# EAGLE board Q Arduino Panel (EAGLE 7.7.0), part 1 of 2
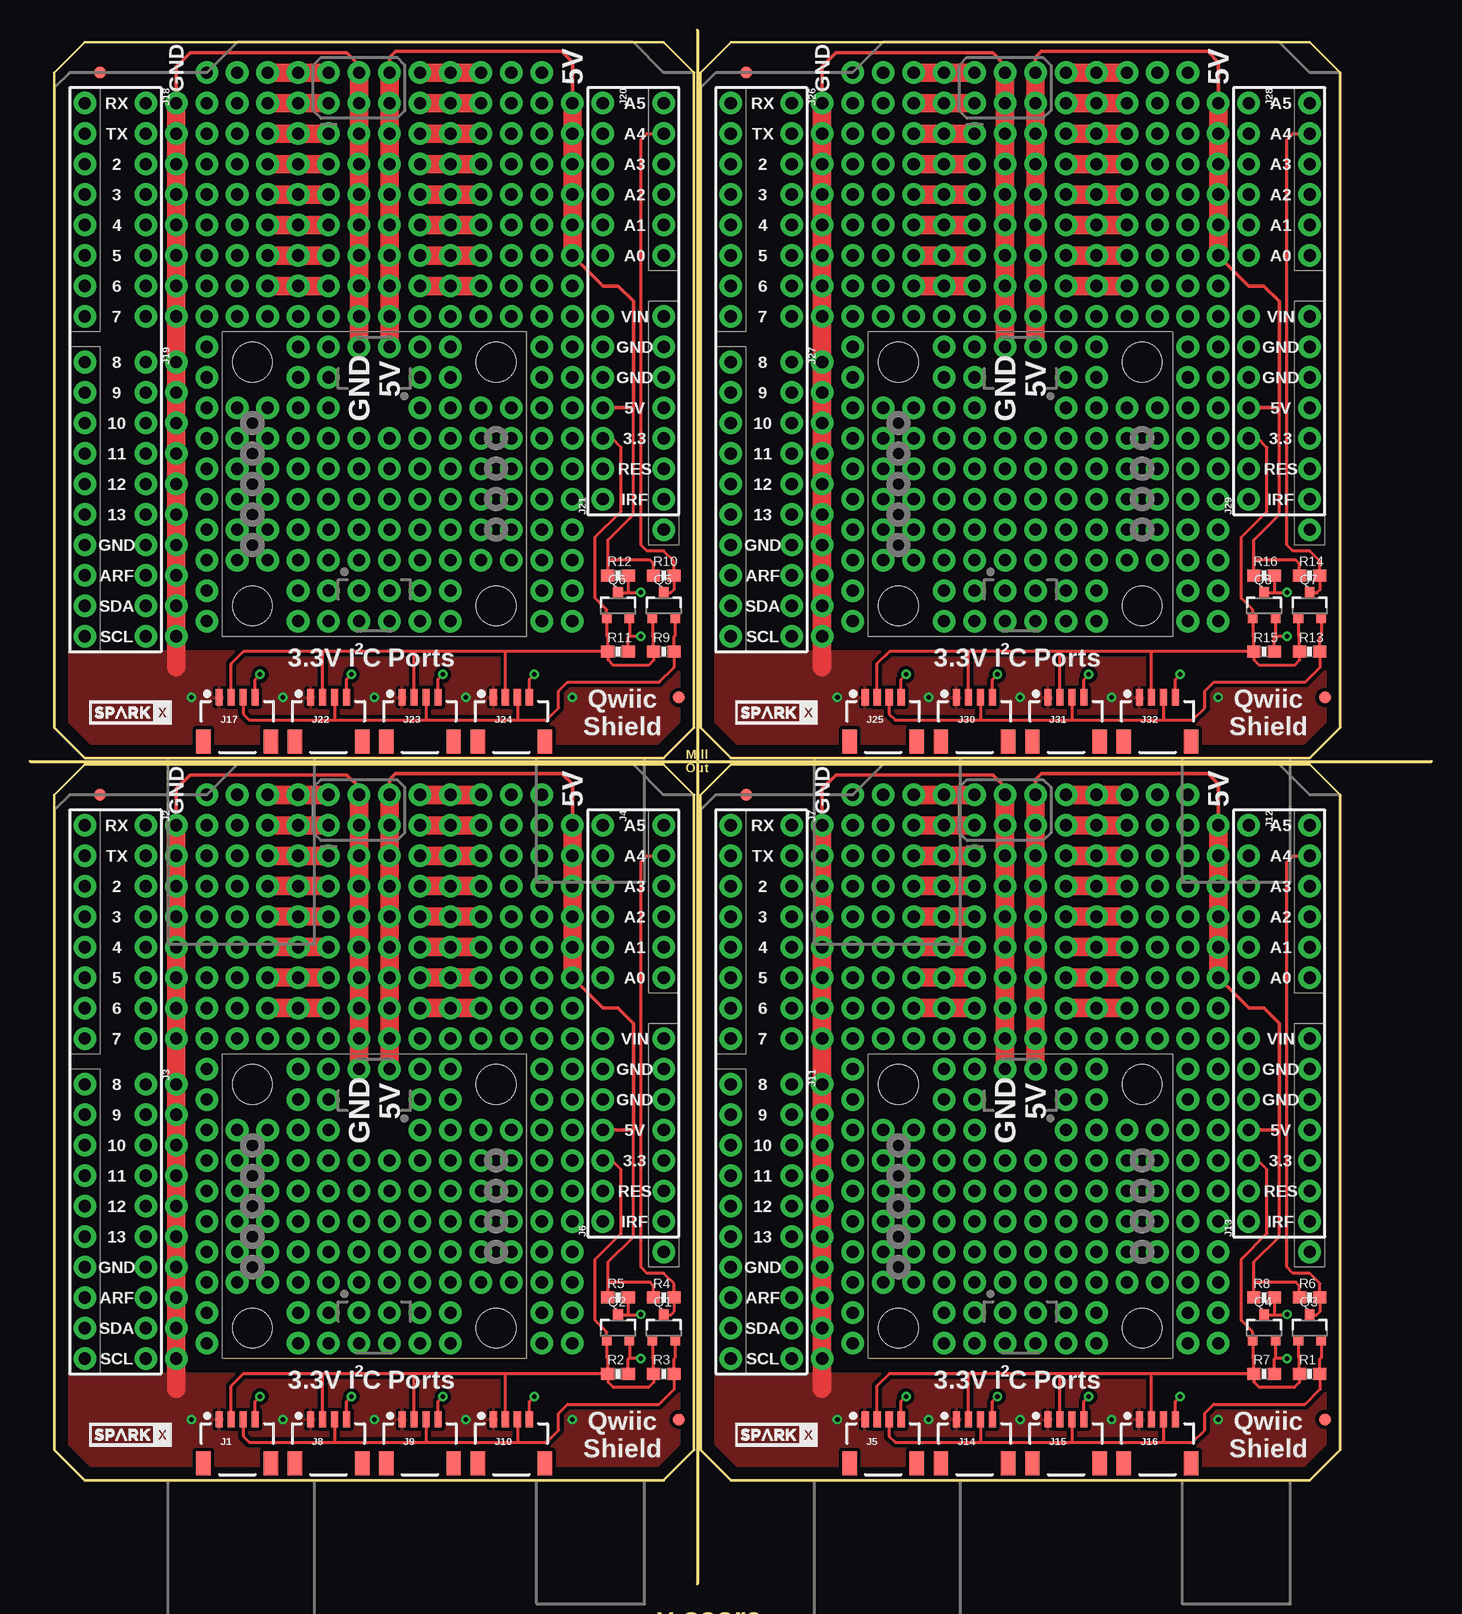
[diagram p0: board, top side]
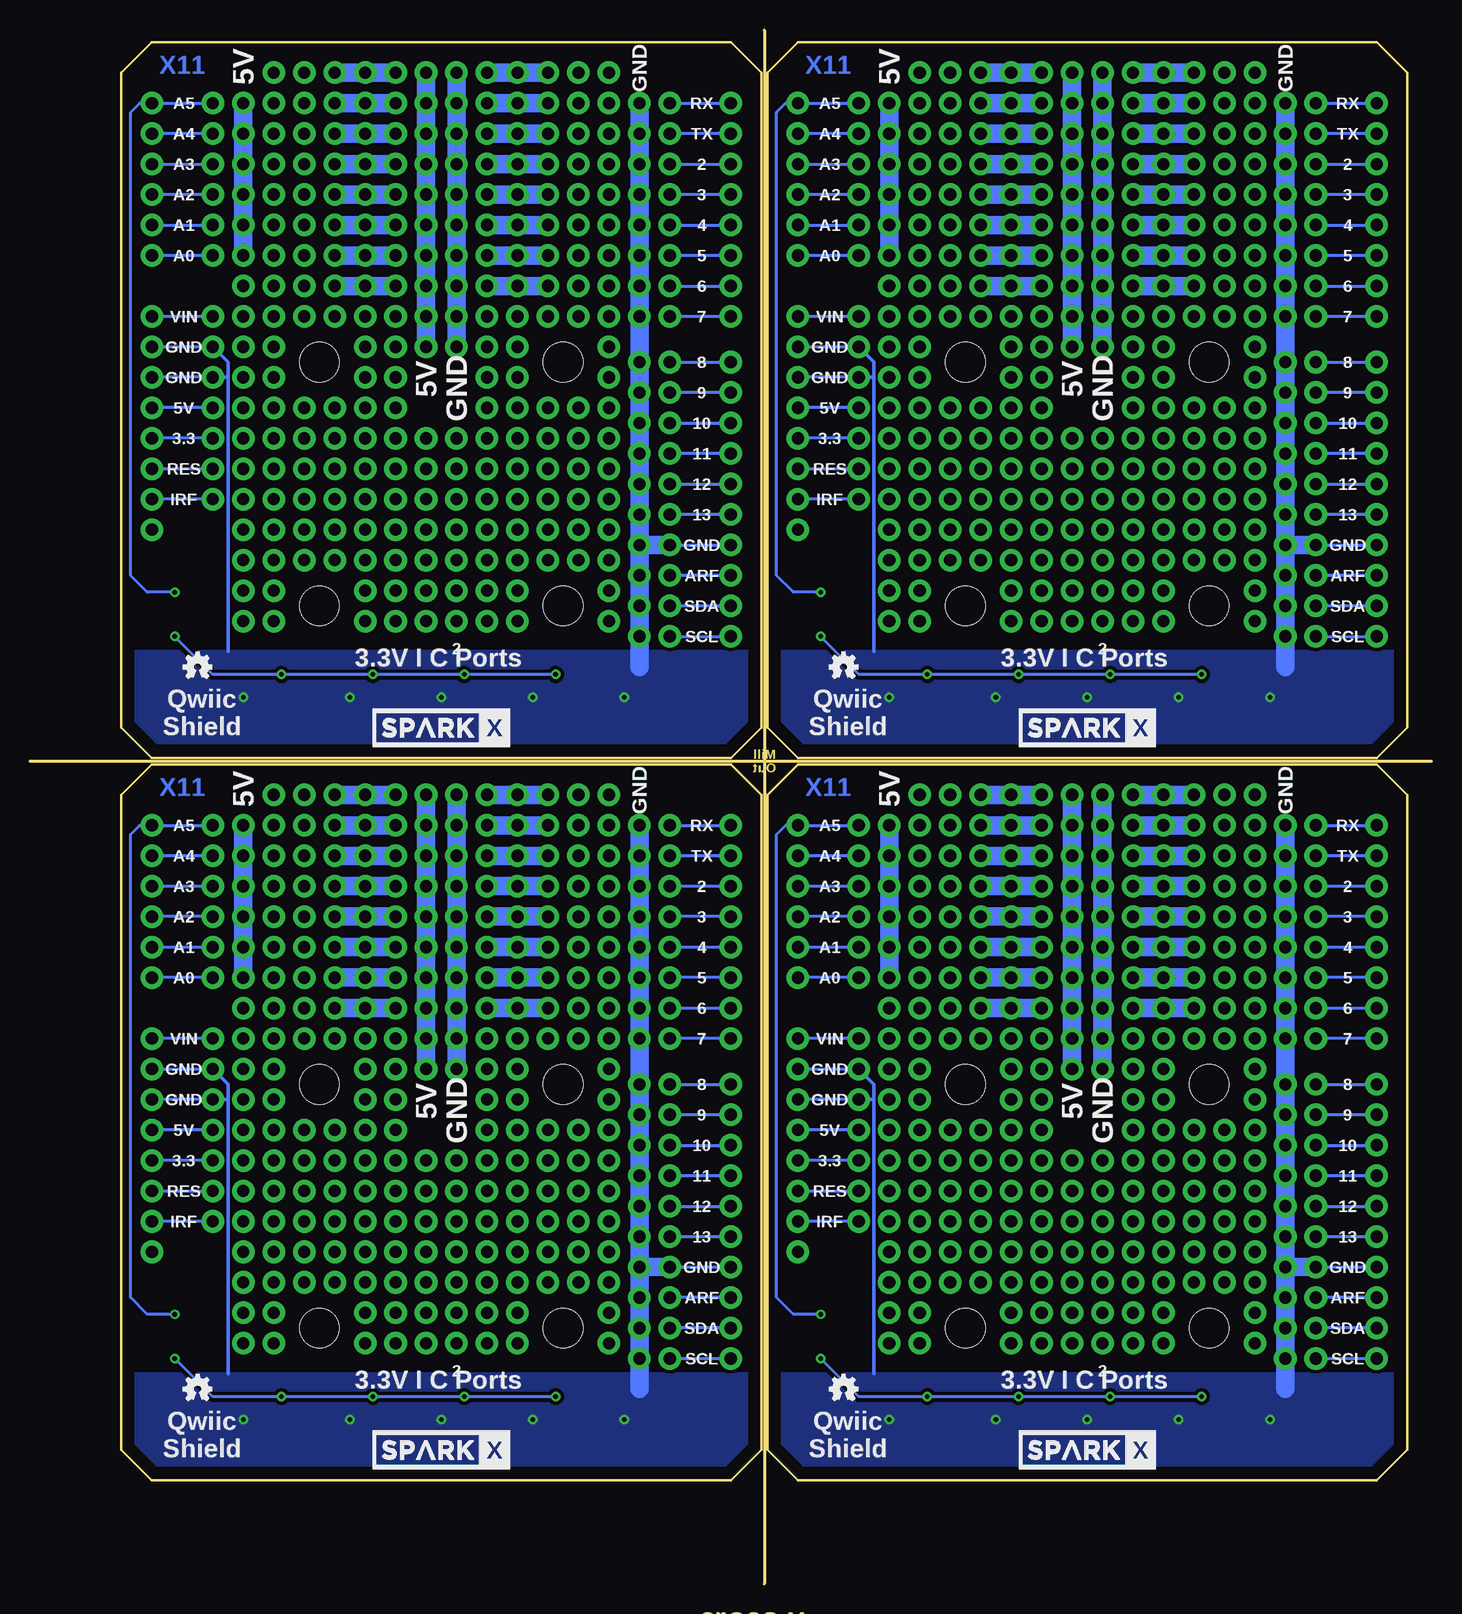
[diagram p1: board, bottom side, seen from below]

Size 116.84 x 129.54 mm. Coordinates in mm from the lower left corner, seen from the top.
Outline: 55.63,129.54 55.63,0
Outline: 0,68.58 116.84,68.58
Outline: 55.37,11.18 55.37,65.79 52.83,68.33 4.57,68.33 2.03,65.79 2.03,11.18 4.57,8.64 52.83,8.64 55.37,11.18
Outline: 109.22,11.18 109.22,65.79 106.68,68.33 58.42,68.33 55.88,65.79 55.88,11.18 58.42,8.64 106.68,8.64 109.22,11.18
Outline: 55.37,71.37 55.37,125.98 52.83,128.52 4.57,128.52 2.03,125.98 2.03,71.37 4.57,68.83 52.83,68.83 55.37,71.37
Outline: 109.22,71.37 109.22,125.98 106.68,128.52 58.42,128.52 55.88,125.98 55.88,71.37 58.42,68.83 106.68,68.83 109.22,71.37
Copper layers (1*16): Top 0.035mm / dielectric 1.5mm / Bottom 0.035mm
Design rules "default": minimum track width 10mil, minimum drill 0.6mm, track to track 8mil, track to pad 8mil, pad to pad 8mil, via to via 8mil, smd to smd 8mil, copper to edge 40mil, drill to drill 8mil, minimum pad ring 10mil, minimum via ring 8mil, stop-mask expansion 4mil, vias tented up to drill 0mil, thermal gap 10mil
Net classes: 0 Default: width 0.203 mm; 1 vcc: width 0.203 mm

## Footprints (pad centres in the part's own frame; a part is rotated, then mirrored left to right if it is on the bottom)
FIDUCIAL-1X2 = smd 1 x 1: 1 0,0
1X04_1MM_RA = smd 0.6 x 1.35: 1 -1.5,0; 2 -0.5,0; 3 0.5,0; 4 1.5,0 | smd 1.2 x 2: NC1 2.8,-3.675; NC2 -2.8,-3.675
1X08_NO_SILK = drill 1.016 pad 1.88: 1 0,0; 2 2.54,0; 3 5.08,0; 4 7.62,0; 5 10.16,0; 6 12.7,0; 7 15.24,0; 8 17.78,0
1X10_NO_SILK = drill 1.016 pad 1.88: 1 0,0; 2 2.54,0; 3 5.08,0; 4 7.62,0; 5 10.16,0; 6 12.7,0; 7 15.24,0; 8 17.78,0; 9 20.32,0; 10 22.86,0
1X06_NO_SILK = drill 1.016 pad 1.88: 1 0,0; 2 2.54,0; 3 5.08,0; 4 7.62,0; 5 10.16,0; 6 12.7,0
1X07_NO_SILK = drill 1.016 pad 1.88: 1 0,0; 2 2.54,0; 3 5.08,0; 4 7.62,0; 5 10.16,0; 6 12.7,0; 7 15.24,0
SOT23-3 = smd 0.8 x 0.9: 1 -0.95,-1; 2 0.95,-1; 3 0,1.1
0603-RES = smd 1.1 x 1: 1 -0.85,0; 2 0.85,0
UNO_R3_SHIELD_NOLABELS = drill 1.016 pad 1.88: 3.3V 50.8,26.67; 5V 50.8,29.21; A0 50.8,41.91; A1 50.8,44.45; A2 50.8,46.99; A3 50.8,49.53; A4 50.8,52.07; A5 50.8,54.61; AREF 2.54,15.24; D2 2.54,49.53; D3 2.54,46.99; D4 2.54,44.45; D5 2.54,41.91; D6 2.54,39.37; D7 2.54,36.83; D8 2.54,33.02; D9 2.54,30.48; D10 2.54,27.94; D11 2.54,25.4; D12 2.54,22.86; D13 2.54,20.32; GND@0 50.8,31.75; GND@1 50.8,34.29; GND@2 2.54,17.78; IOREF 50.8,21.59; NC 50.8,19.05; RES 50.8,24.13; RX 2.54,54.61; SCL 2.54,10.16; SDA 2.54,12.7; TX 2.54,52.07; VIN 50.8,36.83
QWIIC_BOARD_MOUNT_HOLES = hole 3.302: -10.16,10.16; 10.16,10.16; 10.16,-10.16; -10.16,-10.16

## Placement (x,y rotation side)
FD1  FIDUCIAL1X2  [FIDUCIAL-1X2]  54.1,13.72 0 top
FD2  FIDUCIAL1X2  [FIDUCIAL-1X2]  5.84,65.79 0 top
FD3  FIDUCIAL1X2  [FIDUCIAL-1X2]  107.95,13.72 0 top
FD4  FIDUCIAL1X2  [FIDUCIAL-1X2]  59.69,65.79 0 top
FD5  FIDUCIAL1X2  [FIDUCIAL-1X2]  54.1,73.91 0 top
FD6  FIDUCIAL1X2  [FIDUCIAL-1X2]  5.84,125.98 0 top
FD7  FIDUCIAL1X2  [FIDUCIAL-1X2]  107.95,73.91 0 top
FD8  FIDUCIAL1X2  [FIDUCIAL-1X2]  59.69,125.98 0 top
J1  [1X04_1MM_RA]  17.27,13.72 0 top
J2  [1X08_NO_SILK]  9.65,63.25 270 top
J3  [1X10_NO_SILK]  9.65,41.66 270 top
J4  [1X06_NO_SILK]  47.75,63.25 270 top
J5  [1X04_1MM_RA]  71.12,13.72 0 top
J6  [1X07_NO_SILK]  47.75,30.23 90 top
J7  [1X08_NO_SILK]  63.5,63.25 270 top
J8  [1X04_1MM_RA]  24.89,13.72 0 top
J9  [1X04_1MM_RA]  32.51,13.72 0 top
J10  [1X04_1MM_RA]  40.13,13.72 0 top
J11  [1X10_NO_SILK]  63.5,41.66 270 top
J12  [1X06_NO_SILK]  101.6,63.25 270 top
J13  [1X07_NO_SILK]  101.6,30.23 90 top
J14  [1X04_1MM_RA]  78.74,13.72 0 top
J15  [1X04_1MM_RA]  86.36,13.72 0 top
J16  [1X04_1MM_RA]  93.98,13.72 0 top
J17  [1X04_1MM_RA]  17.27,73.91 0 top
J18  [1X08_NO_SILK]  9.65,123.44 270 top
J19  [1X10_NO_SILK]  9.65,101.85 270 top
J20  [1X06_NO_SILK]  47.75,123.44 270 top
J21  [1X07_NO_SILK]  47.75,90.42 90 top
J22  [1X04_1MM_RA]  24.89,73.91 0 top
J23  [1X04_1MM_RA]  32.51,73.91 0 top
J24  [1X04_1MM_RA]  40.13,73.91 0 top
J25  [1X04_1MM_RA]  71.12,73.91 0 top
J26  [1X08_NO_SILK]  63.5,123.44 270 top
J27  [1X10_NO_SILK]  63.5,101.85 270 top
J28  [1X06_NO_SILK]  101.6,123.44 270 top
J29  [1X07_NO_SILK]  101.6,90.42 90 top
J30  [1X04_1MM_RA]  78.74,73.91 0 top
J31  [1X04_1MM_RA]  86.36,73.91 0 top
J32  [1X04_1MM_RA]  93.98,73.91 0 top
LOGO1  OSHW-LOGOMINI  [OSHW-LOGO-MINI]  49.02,16.26 0 bottom
LOGO2  OSHW-LOGOMINI  [OSHW-LOGO-MINI]  102.87,16.26 0 bottom
LOGO3  OSHW-LOGOMINI  [OSHW-LOGO-MINI]  49.02,76.45 0 bottom
LOGO4  OSHW-LOGOMINI  [OSHW-LOGO-MINI]  102.87,76.45 0 bottom
Q1  200mA/50V  [SOT23-3]  52.83,21.34 0 top
Q2  200mA/50V  [SOT23-3]  49.02,21.34 0 top
Q3  200mA/50V  [SOT23-3]  106.68,21.34 0 top
Q4  200mA/50V  [SOT23-3]  102.87,21.34 0 top
Q5  200mA/50V  [SOT23-3]  52.83,81.53 0 top
Q6  200mA/50V  [SOT23-3]  49.02,81.53 0 top
Q7  200mA/50V  [SOT23-3]  106.68,81.53 0 top
Q8  200mA/50V  [SOT23-3]  102.87,81.53 0 top
R1  4.7K  [0603-RES]  106.68,17.53 0 top
R2  4.7K  [0603-RES]  49.02,17.53 0 top
R3  4.7K  [0603-RES]  52.83,17.53 0 top
R4  4.7K  [0603-RES]  52.83,23.88 0 top
R5  4.7K  [0603-RES]  49.02,23.88 0 top
R6  4.7K  [0603-RES]  106.68,23.88 0 top
R7  4.7K  [0603-RES]  102.87,17.53 0 top
R8  4.7K  [0603-RES]  102.87,23.88 0 top
R9  4.7K  [0603-RES]  52.83,77.72 0 top
R10  4.7K  [0603-RES]  52.83,84.07 0 top
R11  4.7K  [0603-RES]  49.02,77.72 0 top
R12  4.7K  [0603-RES]  49.02,84.07 0 top
R13  4.7K  [0603-RES]  106.68,77.72 0 top
R14  4.7K  [0603-RES]  106.68,84.07 0 top
R15  4.7K  [0603-RES]  102.87,77.72 0 top
R16  4.7K  [0603-RES]  102.87,84.07 0 top
U1  ARDUINO UNO  [UNO_R3_SHIELD_NOLABELS]  2.03,8.64 0 top
U2  ARDUINO UNO  [UNO_R3_SHIELD_NOLABELS]  55.88,8.64 0 top
U3  ARDUINO UNO  [UNO_R3_SHIELD_NOLABELS]  2.03,68.83 0 top
U4  ARDUINO UNO  [UNO_R3_SHIELD_NOLABELS]  55.88,68.83 0 top
U$1  SPARKX-LOGO3  [SPARKX-SMALL]  8.38,12.45 0 top
U$2  SPARKX-LOGO5  [SPARKX-LARGE]  28.7,11.18 0 bottom
U$3  QWIIC_BOARD_OUTLINEH  [QWIIC_BOARD_MOUNT_HOLES]  28.7,31.5 90 top
U$4  SPARKX-LOGO3  [SPARKX-SMALL]  62.23,12.45 0 top
U$5  SPARKX-LOGO5  [SPARKX-LARGE]  82.55,11.18 0 bottom
U$6  QWIIC_BOARD_OUTLINEH  [QWIIC_BOARD_MOUNT_HOLES]  82.55,31.5 90 top
U$7  SPARKX-LOGO3  [SPARKX-SMALL]  8.38,72.64 0 top
U$8  SPARKX-LOGO5  [SPARKX-LARGE]  28.7,71.37 0 bottom
U$9  QWIIC_BOARD_OUTLINEH  [QWIIC_BOARD_MOUNT_HOLES]  28.7,91.69 90 top
U$10  SPARKX-LOGO3  [SPARKX-SMALL]  62.23,72.64 0 top
U$11  SPARKX-LOGO5  [SPARKX-LARGE]  82.55,71.37 0 bottom
U$12  QWIIC_BOARD_OUTLINEH  [QWIIC_BOARD_MOUNT_HOLES]  82.55,91.69 90 top

## Library data of the parts
FD1-FD8 LOGO1-LOGO4 = SparkFun-Aesthetics
J1 J5 J8-J10 J14-J17 J22-J25 J30-J32 U$1-U$12 = SparkX
J2 J7 J18 J26 = SparkFun-Connectors; PROD_ID: CONN-08438
J3 J11 J19 J27 = SparkFun-Connectors; PROD_ID: CONN-11563
J4 J12 J20 J28 = SparkFun-Connectors; PROD_ID: CONN-08437
J6 J13 J21 J29 = SparkFun-Connectors
Q1-Q8 = SparkFun-DiscreteSemi; PROD_ID: TRANS-00830
R1-R16 = SparkFun-Resistors; PROD_ID: RES-07857
U1-U4 = SparkFun-Boards

## Nets
3.3V: J1.2 J6.3 J8.2 J9.2 J10.2 Q1.1 Q2.1 R2.1 R3.1 U1.3.3V
3.3V1: J5.2 J13.3 J14.2 J15.2 J16.2 Q3.1 Q4.1 R1.1 R7.1 U2.3.3V
3.3V2: J17.2 J21.3 J22.2 J23.2 J24.2 Q5.1 Q6.1 R9.1 R11.1 U3.3.3V
3.3V3: J25.2 J29.3 J30.2 J31.2 J32.2 Q7.1 Q8.1 R13.1 R15.1 U4.3.3V
5V: J6.4 R4.1 R5.1 U1.5V
5V1: J13.4 R6.1 R8.1 U2.5V
5V2: J21.4 R10.1 R12.1 U3.5V
5V3: J29.4 R14.1 R16.1 U4.5V
A0: J4.6 U1.A0
A1: J4.5 U1.A1
A2: J4.4 U1.A2
A3: J4.3 U1.A3
A4: J12.3 U2.A3
A5: J12.4 U2.A2
A6: J12.5 U2.A1
A7: J12.6 U2.A0
A8: J20.3 U3.A3
A9: J20.4 U3.A2
A10: J20.5 U3.A1
A11: J20.6 U3.A0
A12: J28.3 U4.A3
A13: J28.4 U4.A2
A14: J28.5 U4.A1
A15: J28.6 U4.A0
AREF: J3.8 U1.AREF
AREF1: J11.8 U2.AREF
AREF2: J19.8 U3.AREF
AREF3: J27.8 U4.AREF
D1: J7.3 U2.D2
D2: J2.3 U1.D2
D3: J2.4 U1.D3
D4: J2.5 U1.D4
D5: J2.6 U1.D5
D6: J2.7 U1.D6
D7: J2.8 U1.D7
D8: J3.1 U1.D8
D9: J3.2 U1.D9
D10: J3.3 U1.D10
D11: J3.4 U1.D11
D12: J3.5 U1.D12
D13: J3.6 U1.D13
D14: J7.4 U2.D3
D15: J7.5 U2.D4
D16: J7.6 U2.D5
D17: J7.7 U2.D6
D18: J7.8 U2.D7
D19: J11.1 U2.D8
D20: J11.2 U2.D9
D21: J11.3 U2.D10
D22: J11.4 U2.D11
D23: J11.5 U2.D12
D24: J11.6 U2.D13
D25: J18.3 U3.D2
D26: J18.4 U3.D3
D27: J18.5 U3.D4
D28: J18.6 U3.D5
D29: J18.7 U3.D6
D30: J18.8 U3.D7
D31: J19.1 U3.D8
D32: J19.2 U3.D9
D33: J19.3 U3.D10
D34: J19.4 U3.D11
D35: J19.5 U3.D12
D36: J19.6 U3.D13
D37: J26.3 U4.D2
D38: J26.4 U4.D3
D39: J26.5 U4.D4
D40: J26.6 U4.D5
D41: J26.7 U4.D6
D42: J26.8 U4.D7
D43: J27.1 U4.D8
D44: J27.2 U4.D9
D45: J27.3 U4.D10
D46: J27.4 U4.D11
D47: J27.5 U4.D12
D48: J27.6 U4.D13
GND [vcc]: J1.1 J3.7 J6.5 J6.6 J8.1 J9.1 J10.1 U1.GND@0 U1.GND@1 U1.GND@2
GND1 [vcc]: J5.1 J11.7 J13.5 J13.6 J14.1 J15.1 J16.1 U2.GND@0 U2.GND@1 U2.GND@2
GND2 [vcc]: J17.1 J19.7 J21.5 J21.6 J22.1 J23.1 J24.1 U3.GND@0 U3.GND@1 U3.GND@2
GND3 [vcc]: J25.1 J27.7 J29.5 J29.6 J30.1 J31.1 J32.1 U4.GND@0 U4.GND@1 U4.GND@2
HV_SCL: J4.1 Q2.3 R5.2 U1.A5
HV_SCL1: J12.1 Q4.3 R8.2 U2.A5
HV_SCL2: J20.1 Q6.3 R12.2 U3.A5
HV_SCL3: J28.1 Q8.3 R16.2 U4.A5
HV_SDA: J4.2 Q1.3 R4.2 U1.A4
HV_SDA1: J12.2 Q3.3 R6.2 U2.A4
HV_SDA2: J20.2 Q5.3 R10.2 U3.A4
HV_SDA3: J28.2 Q7.3 R14.2 U4.A4
IOREF: J6.1 U1.IOREF
IOREF1: J13.1 U2.IOREF
IOREF2: J21.1 U3.IOREF
IOREF3: J29.1 U4.IOREF
RES: J6.2 U1.RES
RES1: J13.2 U2.RES
RES2: J21.2 U3.RES
RES3: J29.2 U4.RES
RX: J2.1 U1.RX
RX1: J7.1 U2.RX
RX2: J18.1 U3.RX
RX3: J26.1 U4.RX
SCL: J1.4 J8.4 J9.4 J10.4 Q2.2 R2.2
SCL1: J3.10 U1.SCL
SCL2: J5.4 J14.4 J15.4 J16.4 Q4.2 R7.2
SCL3: J11.10 U2.SCL
SCL4: J17.4 J22.4 J23.4 J24.4 Q6.2 R11.2
SCL5: J19.10 U3.SCL
SCL6: J25.4 J30.4 J31.4 J32.4 Q8.2 R15.2
SCL7: J27.10 U4.SCL
SDA: J1.3 J8.3 J9.3 J10.3 Q1.2 R3.2
SDA1: J3.9 U1.SDA
SDA2: J5.3 J14.3 J15.3 J16.3 Q3.2 R1.2
SDA3: J11.9 U2.SDA
SDA4: J17.3 J22.3 J23.3 J24.3 Q5.2 R9.2
SDA5: J19.9 U3.SDA
SDA6: J25.3 J30.3 J31.3 J32.3 Q7.2 R13.2
SDA7: J27.9 U4.SDA
TX: J2.2 U1.TX
TX1: J7.2 U2.TX
TX2: J18.2 U3.TX
TX3: J26.2 U4.TX
VIN [vcc]: J6.7 U1.VIN
VIN1 [vcc]: J13.7 U2.VIN
VIN2 [vcc]: J21.7 U3.VIN
VIN3 [vcc]: J29.7 U4.VIN

## Tracks (layer width: path | path; a pad name or v marks a point on that pad's centre or on a via)
3.3V
  Top 0.254: R2.1 39.62,17.53 | 39.62,17.53 32,17.53 | 32,17.53 24.38,17.53 | 24.38,17.53 17.78,17.53 16.77,16.52 J1.2 | J8.2 24.39,17.52 24.38,17.53 | J9.2 32.01,17.52 32,17.53 | J10.2 39.63,17.52 39.62,17.53 | R2.1 48.17,18.76 48.07,18.86 Q2.1 48.07,21.02 47.12,21.97 47.12,27.05 49.28,29.21 49.28,34.54 48.51,35.31 J6.3 | Q1.1 51.88,18.86 51.98,18.76 R3.1 51.98,16.8 51.56,16.38 48.64,16.38 48.17,16.85 R2.1
  Bottom 0.254: J6.3 U1.3.3V
3.3V1
  Top 0.254: R7.1 93.47,17.53 | 93.47,17.53 85.85,17.53 | 85.85,17.53 78.23,17.53 | 78.23,17.53 71.63,17.53 70.62,16.52 J5.2 | J14.2 78.24,17.52 78.23,17.53 | J15.2 85.86,17.52 85.85,17.53 | J16.2 93.48,17.52 93.47,17.53 | R7.1 102.02,18.76 101.92,18.86 Q4.1 101.92,21.02 100.97,21.97 100.97,27.05 103.12,29.21 103.12,34.54 102.36,35.31 J13.3 | Q3.1 105.73,18.86 105.83,18.76 R1.1 105.83,16.8 105.41,16.38 102.49,16.38 102.02,16.85 R7.1
  Bottom 0.254: J13.3 U2.3.3V
3.3V2
  Top 0.254: R11.1 39.62,77.72 | 39.62,77.72 32,77.72 | 32,77.72 24.38,77.72 | 24.38,77.72 17.78,77.72 16.77,76.72 J17.2 | J22.2 24.39,77.72 24.38,77.72 | J23.2 32.01,77.72 32,77.72 | J24.2 39.63,77.72 39.62,77.72 | R11.1 48.17,78.95 48.07,79.05 Q6.1 48.07,81.21 47.12,82.17 47.12,87.25 49.28,89.41 49.28,94.74 48.51,95.5 J21.3 | Q5.1 51.88,79.05 51.98,78.95 R9.1 51.98,77 51.56,76.58 48.64,76.58 48.17,77.05 R11.1
  Bottom 0.254: J21.3 U3.3.3V
3.3V3
  Top 0.254: R15.1 93.47,77.72 | 93.47,77.72 85.85,77.72 | 85.85,77.72 78.23,77.72 | 78.23,77.72 71.63,77.72 70.62,76.72 J25.2 | J30.2 78.24,77.72 78.23,77.72 | J31.2 85.86,77.72 85.85,77.72 | J32.2 93.48,77.72 93.47,77.72 | R15.1 102.02,78.95 101.92,79.05 Q8.1 101.92,81.21 100.97,82.17 100.97,87.25 103.12,89.41 103.12,94.74 102.36,95.5 J29.3 | Q7.1 105.73,79.05 105.83,78.95 R13.1 105.83,77 105.41,76.58 102.49,76.58 102.02,77.05 R15.1
  Bottom 0.254: J29.3 U4.3.3V
5V  (via drill 1.02 pad 1.88)
  Top 0.254: R4.1 51.98,24.85 51.69,25.15 48.17,25.15 | R5.1 48.17,25.15 | 48.17,25.15 48.17,26.84 50.29,28.96 50.29,37.85
  Top 0.305: v45.21,63.25 45.21,66.67 44.32,67.56 30.48,67.56 29.97,67.06 v29.97,65.79 | v45.21,50.55 47.75,48.01 49.02,48.01 50.29,46.74 50.29,37.85 J6.4
  Top 1.524: v29.97,65.79 v29.97,63.25 v29.97,60.71 v29.97,58.17 v29.97,55.63 v29.97,53.09 v29.97,50.55 v29.97,48.01 v29.97,45.47 v29.97,42.93 | v45.21,63.25 v45.21,60.71 v45.21,58.17 v45.21,55.63 v45.21,53.09 v45.21,50.55
  Bottom 0.254: J6.4 U1.5V
  Bottom 1.524: v45.21,63.25 v45.21,50.55 | v29.97,65.79 v29.97,63.25 v29.97,60.71 v29.97,58.17 v29.97,55.63 v29.97,53.09 v29.97,50.55 v29.97,48.01 v29.97,45.47 v29.97,42.93
5V1  (via drill 1.02 pad 1.88)
  Top 0.254: R6.1 105.83,24.85 105.54,25.15 102.02,25.15 | R8.1 102.02,25.15 | 102.02,25.15 102.02,26.84 104.14,28.96 104.14,37.85
  Top 0.305: v99.06,63.25 99.06,66.67 98.17,67.56 84.33,67.56 83.82,67.06 v83.82,65.79 | v99.06,50.55 101.6,48.01 102.87,48.01 104.14,46.74 104.14,37.85 J13.4
  Top 1.524: v83.82,65.79 v83.82,63.25 v83.82,60.71 v83.82,58.17 v83.82,55.63 v83.82,53.09 v83.82,50.55 v83.82,48.01 v83.82,45.47 v83.82,42.93 | v99.06,63.25 v99.06,60.71 v99.06,58.17 v99.06,55.63 v99.06,53.09 v99.06,50.55
  Bottom 0.254: J13.4 U2.5V
  Bottom 1.524: v99.06,63.25 v99.06,50.55 | v83.82,65.79 v83.82,63.25 v83.82,60.71 v83.82,58.17 v83.82,55.63 v83.82,53.09 v83.82,50.55 v83.82,48.01 v83.82,45.47 v83.82,42.93
5V2  (via drill 1.02 pad 1.88)
  Top 0.254: R10.1 51.98,85.05 51.69,85.34 48.17,85.34 | R12.1 48.17,85.34 | 48.17,85.34 48.17,87.03 50.29,89.15 50.29,98.04
  Top 0.305: v45.21,123.44 45.21,126.87 44.32,127.76 30.48,127.76 29.97,127.25 v29.97,125.98 | v45.21,110.74 47.75,108.2 49.02,108.2 50.29,106.93 50.29,98.04 J21.4
  Top 1.524: v29.97,125.98 v29.97,123.44 v29.97,120.9 v29.97,118.36 v29.97,115.82 v29.97,113.28 v29.97,110.74 v29.97,108.2 v29.97,105.66 v29.97,103.12 | v45.21,123.44 v45.21,120.9 v45.21,118.36 v45.21,115.82 v45.21,113.28 v45.21,110.74
  Bottom 0.254: J21.4 U3.5V
  Bottom 1.524: v45.21,123.44 v45.21,110.74 | v29.97,125.98 v29.97,123.44 v29.97,120.9 v29.97,118.36 v29.97,115.82 v29.97,113.28 v29.97,110.74 v29.97,108.2 v29.97,105.66 v29.97,103.12
5V3  (via drill 1.02 pad 1.88)
  Top 0.254: R14.1 105.83,85.05 105.54,85.34 102.02,85.34 | R16.1 102.02,85.34 | 102.02,85.34 102.02,87.03 104.14,89.15 104.14,98.04
  Top 0.305: v99.06,123.44 99.06,126.87 98.17,127.76 84.33,127.76 83.82,127.25 v83.82,125.98 | v99.06,110.74 101.6,108.2 102.87,108.2 104.14,106.93 104.14,98.04 J29.4
  Top 1.524: v83.82,125.98 v83.82,123.44 v83.82,120.9 v83.82,118.36 v83.82,115.82 v83.82,113.28 v83.82,110.74 v83.82,108.2 v83.82,105.66 v83.82,103.12 | v99.06,123.44 v99.06,120.9 v99.06,118.36 v99.06,115.82 v99.06,113.28 v99.06,110.74
  Bottom 0.254: J29.4 U4.5V
  Bottom 1.524: v99.06,123.44 v99.06,110.74 | v83.82,125.98 v83.82,123.44 v83.82,120.9 v83.82,118.36 v83.82,115.82 v83.82,113.28 v83.82,110.74 v83.82,108.2 v83.82,105.66 v83.82,103.12
A0
  Bottom 0.254: J4.6 U1.A0
A1
  Bottom 0.254: U1.A1 J4.5
A2
  Bottom 0.254: J4.4 U1.A2
A3
  Bottom 0.254: U1.A3 J4.3
A4
  Bottom 0.254: U2.A3 J12.3
A5
  Bottom 0.254: J12.4 U2.A2
A6
  Bottom 0.254: U2.A1 J12.5
A7
  Bottom 0.254: J12.6 U2.A0
A8
  Bottom 0.254: U3.A3 J20.3
A9
  Bottom 0.254: J20.4 U3.A2
A10
  Bottom 0.254: U3.A1 J20.5
A11
  Bottom 0.254: J20.6 U3.A0
A12
  Bottom 0.254: U4.A3 J28.3
A13
  Bottom 0.254: J28.4 U4.A2
A14
  Bottom 0.254: U4.A1 J28.5
A15
  Bottom 0.254: J28.6 U4.A0
AREF
  Bottom 0.254: U1.AREF J3.8
AREF1
  Bottom 0.254: U2.AREF J11.8
AREF2
  Bottom 0.254: U3.AREF J19.8
AREF3
  Bottom 0.254: U4.AREF J27.8
CH1  (via drill 1.02 pad 1.88)
  Top 1.524: v32.51,65.79 v35.05,65.79 v37.59,65.79
  Bottom 1.524: v32.51,65.79 v35.05,65.79 v37.59,65.79
CH2  (via drill 1.02 pad 1.88)
  Top 1.524: v32.51,63.25 v35.05,63.25 v37.59,63.25
  Bottom 1.524: v37.59,63.25 v35.05,63.25 v32.51,63.25
CH3  (via drill 1.02 pad 1.88)
  Top 1.524: v32.51,60.71 v35.05,60.71 v37.59,60.71
  Bottom 1.524: v37.59,60.71 v35.05,60.71 v32.51,60.71
CH4  (via drill 1.02 pad 1.88)
  Top 1.524: v32.51,58.17 v35.05,58.17 v37.59,58.17
  Bottom 1.524: v37.59,58.17 v35.05,58.17 v32.51,58.17
CH5  (via drill 1.02 pad 1.88)
  Top 1.524: v32.51,55.63 v35.05,55.63 v37.59,55.63
  Bottom 1.524: v37.59,55.63 v35.05,55.63 v32.51,55.63
CH6  (via drill 1.02 pad 1.88)
  Top 1.524: v32.51,53.09 v35.05,53.09 v37.59,53.09
  Bottom 1.524: v37.59,53.09 v35.05,53.09 v32.51,53.09
CH7  (via drill 1.02 pad 1.88)
  Top 1.524: v32.51,50.55 v35.05,50.55 v37.59,50.55
  Bottom 1.524: v37.59,50.55 v35.05,50.55 v32.51,50.55
CH8  (via drill 1.02 pad 1.88)
  Top 1.524: v32.51,48.01 v35.05,48.01 v37.59,48.01
  Bottom 1.524: v37.59,48.01 v35.05,48.01 v32.51,48.01
CH9  (via drill 1.02 pad 1.88)
  Top 1.524: v19.81,65.79 v22.35,65.79 v24.89,65.79
  Bottom 1.524: v24.89,65.79 v22.35,65.79 v19.81,65.79
CH10  (via drill 1.02 pad 1.88)
  Top 1.524: v19.81,63.25 v22.35,63.25 v24.89,63.25
  Bottom 1.524: v24.89,63.25 v22.35,63.25 v19.81,63.25
CH11  (via drill 1.02 pad 1.88)
  Top 1.524: v19.81,60.71 v22.35,60.71 v24.89,60.71
  Bottom 1.524: v24.89,60.71 v22.35,60.71 v19.81,60.71
CH12  (via drill 1.02 pad 1.88)
  Top 1.524: v19.81,58.17 v22.35,58.17 v24.89,58.17
  Bottom 1.524: v24.89,58.17 v22.35,58.17 v19.81,58.17
CH13  (via drill 1.02 pad 1.88)
  Top 1.524: v19.81,55.63 v22.35,55.63 v24.89,55.63
  Bottom 1.524: v24.89,55.63 v22.35,55.63 v19.81,55.63
CH14  (via drill 1.02 pad 1.88)
  Top 1.524: v19.81,53.09 v22.35,53.09 v24.89,53.09
  Bottom 1.524: v24.89,53.09 v22.35,53.09 v19.81,53.09
CH15  (via drill 1.02 pad 1.88)
  Top 1.524: v19.81,50.55 v22.35,50.55 v24.89,50.55
  Bottom 1.524: v24.89,50.55 v22.35,50.55 v19.81,50.55
CH16  (via drill 1.02 pad 1.88)
  Top 1.524: v19.81,48.01 v22.35,48.01 v24.89,48.01
  Bottom 1.524: v24.89,48.01 v22.35,48.01 v19.81,48.01
CH17  (via drill 1.02 pad 1.88)
  Top 1.524: v86.36,65.79 v88.9,65.79 v91.44,65.79
  Bottom 1.524: v86.36,65.79 v88.9,65.79 v91.44,65.79
CH18  (via drill 1.02 pad 1.88)
  Top 1.524: v86.36,63.25 v88.9,63.25 v91.44,63.25
  Bottom 1.524: v91.44,63.25 v88.9,63.25 v86.36,63.25
CH19  (via drill 1.02 pad 1.88)
  Top 1.524: v86.36,60.71 v88.9,60.71 v91.44,60.71
  Bottom 1.524: v91.44,60.71 v88.9,60.71 v86.36,60.71
CH20  (via drill 1.02 pad 1.88)
  Top 1.524: v86.36,58.17 v88.9,58.17 v91.44,58.17
  Bottom 1.524: v91.44,58.17 v88.9,58.17 v86.36,58.17
CH21  (via drill 1.02 pad 1.88)
  Top 1.524: v86.36,55.63 v88.9,55.63 v91.44,55.63
  Bottom 1.524: v91.44,55.63 v88.9,55.63 v86.36,55.63
CH22  (via drill 1.02 pad 1.88)
  Top 1.524: v86.36,53.09 v88.9,53.09 v91.44,53.09
  Bottom 1.524: v91.44,53.09 v88.9,53.09 v86.36,53.09
CH23  (via drill 1.02 pad 1.88)
  Top 1.524: v86.36,50.55 v88.9,50.55 v91.44,50.55
  Bottom 1.524: v91.44,50.55 v88.9,50.55 v86.36,50.55
CH24  (via drill 1.02 pad 1.88)
  Top 1.524: v86.36,48.01 v88.9,48.01 v91.44,48.01
  Bottom 1.524: v91.44,48.01 v88.9,48.01 v86.36,48.01
CH25  (via drill 1.02 pad 1.88)
  Top 1.524: v73.66,65.79 v76.2,65.79 v78.74,65.79
  Bottom 1.524: v78.74,65.79 v76.2,65.79 v73.66,65.79
CH26  (via drill 1.02 pad 1.88)
  Top 1.524: v73.66,63.25 v76.2,63.25 v78.74,63.25
  Bottom 1.524: v78.74,63.25 v76.2,63.25 v73.66,63.25
CH27  (via drill 1.02 pad 1.88)
  Top 1.524: v73.66,60.71 v76.2,60.71 v78.74,60.71
  Bottom 1.524: v78.74,60.71 v76.2,60.71 v73.66,60.71
CH28  (via drill 1.02 pad 1.88)
  Top 1.524: v73.66,58.17 v76.2,58.17 v78.74,58.17
  Bottom 1.524: v78.74,58.17 v76.2,58.17 v73.66,58.17
CH29  (via drill 1.02 pad 1.88)
  Top 1.524: v73.66,55.63 v76.2,55.63 v78.74,55.63
  Bottom 1.524: v78.74,55.63 v76.2,55.63 v73.66,55.63
CH30  (via drill 1.02 pad 1.88)
  Top 1.524: v73.66,53.09 v76.2,53.09 v78.74,53.09
  Bottom 1.524: v78.74,53.09 v76.2,53.09 v73.66,53.09
CH31  (via drill 1.02 pad 1.88)
  Top 1.524: v73.66,50.55 v76.2,50.55 v78.74,50.55
  Bottom 1.524: v78.74,50.55 v76.2,50.55 v73.66,50.55
CH32  (via drill 1.02 pad 1.88)
  Top 1.524: v73.66,48.01 v76.2,48.01 v78.74,48.01
  Bottom 1.524: v78.74,48.01 v76.2,48.01 v73.66,48.01
CH33  (via drill 1.02 pad 1.88)
  Top 1.524: v32.51,125.98 v35.05,125.98 v37.59,125.98
  Bottom 1.524: v32.51,125.98 v35.05,125.98 v37.59,125.98
CH34  (via drill 1.02 pad 1.88)
  Top 1.524: v32.51,123.44 v35.05,123.44 v37.59,123.44
  Bottom 1.524: v37.59,123.44 v35.05,123.44 v32.51,123.44
CH35  (via drill 1.02 pad 1.88)
  Top 1.524: v32.51,120.9 v35.05,120.9 v37.59,120.9
  Bottom 1.524: v37.59,120.9 v35.05,120.9 v32.51,120.9
CH36  (via drill 1.02 pad 1.88)
  Top 1.524: v32.51,118.36 v35.05,118.36 v37.59,118.36
  Bottom 1.524: v37.59,118.36 v35.05,118.36 v32.51,118.36
CH37  (via drill 1.02 pad 1.88)
  Top 1.524: v32.51,115.82 v35.05,115.82 v37.59,115.82
  Bottom 1.524: v37.59,115.82 v35.05,115.82 v32.51,115.82
CH38  (via drill 1.02 pad 1.88)
  Top 1.524: v32.51,113.28 v35.05,113.28 v37.59,113.28
  Bottom 1.524: v37.59,113.28 v35.05,113.28 v32.51,113.28
CH39  (via drill 1.02 pad 1.88)
  Top 1.524: v32.51,110.74 v35.05,110.74 v37.59,110.74
  Bottom 1.524: v37.59,110.74 v35.05,110.74 v32.51,110.74
CH40  (via drill 1.02 pad 1.88)
  Top 1.524: v32.51,108.2 v35.05,108.2 v37.59,108.2
  Bottom 1.524: v37.59,108.2 v35.05,108.2 v32.51,108.2
CH41  (via drill 1.02 pad 1.88)
  Top 1.524: v19.81,125.98 v22.35,125.98 v24.89,125.98
  Bottom 1.524: v24.89,125.98 v22.35,125.98 v19.81,125.98
CH42  (via drill 1.02 pad 1.88)
  Top 1.524: v19.81,123.44 v22.35,123.44 v24.89,123.44
  Bottom 1.524: v24.89,123.44 v22.35,123.44 v19.81,123.44
CH43  (via drill 1.02 pad 1.88)
  Top 1.524: v19.81,120.9 v22.35,120.9 v24.89,120.9
  Bottom 1.524: v24.89,120.9 v22.35,120.9 v19.81,120.9
CH44  (via drill 1.02 pad 1.88)
  Top 1.524: v19.81,118.36 v22.35,118.36 v24.89,118.36
  Bottom 1.524: v24.89,118.36 v22.35,118.36 v19.81,118.36
CH45  (via drill 1.02 pad 1.88)
  Top 1.524: v19.81,115.82 v22.35,115.82 v24.89,115.82
  Bottom 1.524: v24.89,115.82 v22.35,115.82 v19.81,115.82
CH46  (via drill 1.02 pad 1.88)
  Top 1.524: v19.81,113.28 v22.35,113.28 v24.89,113.28
  Bottom 1.524: v24.89,113.28 v22.35,113.28 v19.81,113.28
CH47  (via drill 1.02 pad 1.88)
  Top 1.524: v19.81,110.74 v22.35,110.74 v24.89,110.74
  Bottom 1.524: v24.89,110.74 v22.35,110.74 v19.81,110.74
CH48  (via drill 1.02 pad 1.88)
  Top 1.524: v19.81,108.2 v22.35,108.2 v24.89,108.2
  Bottom 1.524: v24.89,108.2 v22.35,108.2 v19.81,108.2
CH49  (via drill 1.02 pad 1.88)
  Top 1.524: v86.36,125.98 v88.9,125.98 v91.44,125.98
  Bottom 1.524: v86.36,125.98 v88.9,125.98 v91.44,125.98
CH50  (via drill 1.02 pad 1.88)
  Top 1.524: v86.36,123.44 v88.9,123.44 v91.44,123.44
  Bottom 1.524: v91.44,123.44 v88.9,123.44 v86.36,123.44
CH51  (via drill 1.02 pad 1.88)
  Top 1.524: v86.36,120.9 v88.9,120.9 v91.44,120.9
  Bottom 1.524: v91.44,120.9 v88.9,120.9 v86.36,120.9
CH52  (via drill 1.02 pad 1.88)
  Top 1.524: v86.36,118.36 v88.9,118.36 v91.44,118.36
  Bottom 1.524: v91.44,118.36 v88.9,118.36 v86.36,118.36
CH53  (via drill 1.02 pad 1.88)
  Top 1.524: v86.36,115.82 v88.9,115.82 v91.44,115.82
  Bottom 1.524: v91.44,115.82 v88.9,115.82 v86.36,115.82
CH54  (via drill 1.02 pad 1.88)
  Top 1.524: v86.36,113.28 v88.9,113.28 v91.44,113.28
  Bottom 1.524: v91.44,113.28 v88.9,113.28 v86.36,113.28
CH55  (via drill 1.02 pad 1.88)
  Top 1.524: v86.36,110.74 v88.9,110.74 v91.44,110.74
  Bottom 1.524: v91.44,110.74 v88.9,110.74 v86.36,110.74
CH56  (via drill 1.02 pad 1.88)
  Top 1.524: v86.36,108.2 v88.9,108.2 v91.44,108.2
  Bottom 1.524: v91.44,108.2 v88.9,108.2 v86.36,108.2
CH57  (via drill 1.02 pad 1.88)
  Top 1.524: v73.66,125.98 v76.2,125.98 v78.74,125.98
  Bottom 1.524: v78.74,125.98 v76.2,125.98 v73.66,125.98
CH58  (via drill 1.02 pad 1.88)
  Top 1.524: v73.66,123.44 v76.2,123.44 v78.74,123.44
  Bottom 1.524: v78.74,123.44 v76.2,123.44 v73.66,123.44
CH59  (via drill 1.02 pad 1.88)
  Top 1.524: v73.66,120.9 v76.2,120.9 v78.74,120.9
  Bottom 1.524: v78.74,120.9 v76.2,120.9 v73.66,120.9
CH60  (via drill 1.02 pad 1.88)
  Top 1.524: v73.66,118.36 v76.2,118.36 v78.74,118.36
  Bottom 1.524: v78.74,118.36 v76.2,118.36 v73.66,118.36
CH61  (via drill 1.02 pad 1.88)
  Top 1.524: v73.66,115.82 v76.2,115.82 v78.74,115.82
  Bottom 1.524: v78.74,115.82 v76.2,115.82 v73.66,115.82
CH62  (via drill 1.02 pad 1.88)
  Top 1.524: v73.66,113.28 v76.2,113.28 v78.74,113.28
  Bottom 1.524: v78.74,113.28 v76.2,113.28 v73.66,113.28
CH63  (via drill 1.02 pad 1.88)
  Top 1.524: v73.66,110.74 v76.2,110.74 v78.74,110.74
  Bottom 1.524: v78.74,110.74 v76.2,110.74 v73.66,110.74
CH64  (via drill 1.02 pad 1.88)
  Top 1.524: v73.66,108.2 v76.2,108.2 v78.74,108.2
  Bottom 1.524: v78.74,108.2 v76.2,108.2 v73.66,108.2
D1
  Bottom 0.254: J7.3 U2.D2
D2
  Bottom 0.254: J2.3 U1.D2
D3
  Bottom 0.254: U1.D3 J2.4
D4
  Bottom 0.254: J2.5 U1.D4
D5
  Bottom 0.254: U1.D5 J2.6
D6
  Bottom 0.254: J2.7 U1.D6
D7
  Bottom 0.254: U1.D7 J2.8
D8
  Bottom 0.254: J3.1 U1.D8
D9
  Bottom 0.254: U1.D9 J3.2
D10
  Bottom 0.254: J3.3 U1.D10
D11
  Bottom 0.254: U1.D11 J3.4
D12
  Bottom 0.254: J3.5 U1.D12
D13
  Bottom 0.254: U1.D13 J3.6
D14
  Bottom 0.254: U2.D3 J7.4
D15
  Bottom 0.254: J7.5 U2.D4
D16
  Bottom 0.254: U2.D5 J7.6
D17
  Bottom 0.254: J7.7 U2.D6
D18
  Bottom 0.254: U2.D7 J7.8
D19
  Bottom 0.254: J11.1 U2.D8
D20
  Bottom 0.254: U2.D9 J11.2
D21
  Bottom 0.254: J11.3 U2.D10
D22
  Bottom 0.254: U2.D11 J11.4
D23
  Bottom 0.254: J11.5 U2.D12
D24
  Bottom 0.254: U2.D13 J11.6
D25
  Bottom 0.254: J18.3 U3.D2
D26
  Bottom 0.254: U3.D3 J18.4
D27
  Bottom 0.254: J18.5 U3.D4
D28
  Bottom 0.254: U3.D5 J18.6
D29
  Bottom 0.254: J18.7 U3.D6
D30
  Bottom 0.254: U3.D7 J18.8
D31
  Bottom 0.254: J19.1 U3.D8
D32
  Bottom 0.254: U3.D9 J19.2
D33
  Bottom 0.254: J19.3 U3.D10
D34
  Bottom 0.254: U3.D11 J19.4
D35
  Bottom 0.254: J19.5 U3.D12
D36
  Bottom 0.254: U3.D13 J19.6
D37
  Bottom 0.254: J26.3 U4.D2
D38
  Bottom 0.254: U4.D3 J26.4
D39
  Bottom 0.254: J26.5 U4.D4
D40
  Bottom 0.254: U4.D5 J26.6
D41
  Bottom 0.254: J26.7 U4.D6
D42
  Bottom 0.254: U4.D7 J26.8
D43
  Bottom 0.254: J27.1 U4.D8
D44
  Bottom 0.254: U4.D9 J27.2
D45
  Bottom 0.254: J27.3 U4.D10
D46
  Bottom 0.254: U4.D11 J27.4
D47
  Bottom 0.254: J27.5 U4.D12
D48
  Bottom 0.254: U4.D13 J27.6
GND  (via drill 0.38, 1.02 pad 1.88)
  Top 0.305: v12.19,63.25 12.19,66.29 13.34,67.44 26.42,67.44 27.43,66.42 v27.43,65.79
  Top 1.524: v27.43,65.79 v27.43,63.25 v27.43,60.71 v27.43,58.17 v27.43,55.63 v27.43,53.09 v27.43,50.55 v27.43,48.01 v27.43,45.47 v27.43,42.93 | v12.19,63.25 v12.19,60.71 v12.19,58.17 v12.19,55.63 v12.19,53.09 v12.19,50.55 v12.19,48.01 v12.19,45.47 v12.19,41.66 v12.19,39.12 v12.19,36.58 v12.19,34.04 v12.19,31.5 v12.19,28.96 v12.19,26.42 v12.19,23.88 v12.19,21.34 v12.19,18.8 12.19,16.26
  Bottom 0.254: U1.GND@1 J6.6 | J6.5 U1.GND@0 | J3.7 U1.GND@2
  Bottom 0.305: J6.6 46.48,41.66 46.48,40.39 | 46.48,40.39 46.48,17.53 | J6.5 46.48,40.39 | 27.43,66.42 v27.43,65.79
  Bottom 1.524: J3.7 v12.19,26.42 | 12.19,16.26 v12.19,18.8 v12.19,41.66 v12.19,45.47 v12.19,48.01 v12.19,50.55 v12.19,53.09 v12.19,55.63 v12.19,58.17 v12.19,60.71 v12.19,63.25 | v27.43,65.79 v27.43,63.25 v27.43,60.71 v27.43,58.17 v27.43,55.63 v27.43,53.09 v27.43,50.55 v27.43,48.01 v27.43,45.47 v27.43,42.93
  other vias: 36.32,13.72 28.7,13.72 21.08,13.72 13.46,13.72 45.21,13.72
  pour Top (isolate 0.305): 55.37,8.64 2.03,8.64 2.03,17.53 55.37,17.53
  pour Bottom (isolate 0.305): 55.37,8.64 2.03,8.64 2.03,17.53 55.37,17.53
GND1  (via drill 0.38, 1.02 pad 1.88)
  Top 0.305: v66.04,63.25 66.04,66.29 67.18,67.44 80.26,67.44 81.28,66.42 v81.28,65.79
  Top 1.524: v81.28,65.79 v81.28,63.25 v81.28,60.71 v81.28,58.17 v81.28,55.63 v81.28,53.09 v81.28,50.55 v81.28,48.01 v81.28,45.47 v81.28,42.93 | v66.04,63.25 v66.04,60.71 v66.04,58.17 v66.04,55.63 v66.04,53.09 v66.04,50.55 v66.04,48.01 v66.04,45.47 v66.04,41.66 v66.04,39.12 v66.04,36.58 v66.04,34.04 v66.04,31.5 v66.04,28.96 v66.04,26.42 v66.04,23.88 v66.04,21.34 v66.04,18.8 66.04,16.26
  Bottom 0.254: U2.GND@1 J13.6 | J13.5 U2.GND@0 | J11.7 U2.GND@2
  Bottom 0.305: J13.6 100.33,41.66 100.33,40.39 | 100.33,40.39 100.33,17.53 | J13.5 100.33,40.39 | 81.28,66.42 v81.28,65.79
  Bottom 1.524: J11.7 v66.04,26.42 | 66.04,16.26 v66.04,18.8 v66.04,41.66 v66.04,45.47 v66.04,48.01 v66.04,50.55 v66.04,53.09 v66.04,55.63 v66.04,58.17 v66.04,60.71 v66.04,63.25 | v81.28,65.79 v81.28,63.25 v81.28,60.71 v81.28,58.17 v81.28,55.63 v81.28,53.09 v81.28,50.55 v81.28,48.01 v81.28,45.47 v81.28,42.93
  other vias: 90.17,13.72 82.55,13.72 74.93,13.72 67.31,13.72 99.06,13.72
  pour Top (isolate 0.305): 109.22,8.64 55.88,8.64 55.88,17.53 109.22,17.53
  pour Bottom (isolate 0.305): 109.22,8.64 55.88,8.64 55.88,17.53 109.22,17.53
GND2  (via drill 0.38, 1.02 pad 1.88)
  Top 0.305: v12.19,123.44 12.19,126.49 13.34,127.63 26.42,127.63 27.43,126.62 v27.43,125.98
  Top 1.524: v27.43,125.98 v27.43,123.44 v27.43,120.9 v27.43,118.36 v27.43,115.82 v27.43,113.28 v27.43,110.74 v27.43,108.2 v27.43,105.66 v27.43,103.12 | v12.19,123.44 v12.19,120.9 v12.19,118.36 v12.19,115.82 v12.19,113.28 v12.19,110.74 v12.19,108.2 v12.19,105.66 v12.19,101.85 v12.19,99.31 v12.19,96.77 v12.19,94.23 v12.19,91.69 v12.19,89.15 v12.19,86.61 v12.19,84.07 v12.19,81.53 v12.19,78.99 12.19,76.45
  Bottom 0.254: U3.GND@1 J21.6 | J21.5 U3.GND@0 | J19.7 U3.GND@2
  Bottom 0.305: J21.6 46.48,101.85 46.48,100.58 | 46.48,100.58 46.48,77.72 | J21.5 46.48,100.58 | 27.43,126.62 v27.43,125.98
  Bottom 1.524: J19.7 v12.19,86.61 | 12.19,76.45 v12.19,78.99 v12.19,101.85 v12.19,105.66 v12.19,108.2 v12.19,110.74 v12.19,113.28 v12.19,115.82 v12.19,118.36 v12.19,120.9 v12.19,123.44 | v27.43,125.98 v27.43,123.44 v27.43,120.9 v27.43,118.36 v27.43,115.82 v27.43,113.28 v27.43,110.74 v27.43,108.2 v27.43,105.66 v27.43,103.12
  other vias: 36.32,73.91 28.7,73.91 21.08,73.91 13.46,73.91 45.21,73.91
  pour Top (isolate 0.305): 55.37,68.83 2.03,68.83 2.03,77.72 55.37,77.72
  pour Bottom (isolate 0.305): 55.37,68.83 2.03,68.83 2.03,77.72 55.37,77.72
GND3  (via drill 0.38, 1.02 pad 1.88)
  Top 0.305: v66.04,123.44 66.04,126.49 67.18,127.63 80.26,127.63 81.28,126.62 v81.28,125.98
  Top 1.524: v81.28,125.98 v81.28,123.44 v81.28,120.9 v81.28,118.36 v81.28,115.82 v81.28,113.28 v81.28,110.74 v81.28,108.2 v81.28,105.66 v81.28,103.12 | v66.04,123.44 v66.04,120.9 v66.04,118.36 v66.04,115.82 v66.04,113.28 v66.04,110.74 v66.04,108.2 v66.04,105.66 v66.04,101.85 v66.04,99.31 v66.04,96.77 v66.04,94.23 v66.04,91.69 v66.04,89.15 v66.04,86.61 v66.04,84.07 v66.04,81.53 v66.04,78.99 66.04,76.45
  Bottom 0.254: U4.GND@1 J29.6 | J29.5 U4.GND@0 | J27.7 U4.GND@2
  Bottom 0.305: J29.6 100.33,101.85 100.33,100.58 | 100.33,100.58 100.33,77.72 | J29.5 100.33,100.58 | 81.28,126.62 v81.28,125.98
  Bottom 1.524: J27.7 v66.04,86.61 | 66.04,76.45 v66.04,78.99 v66.04,101.85 v66.04,105.66 v66.04,108.2 v66.04,110.74 v66.04,113.28 v66.04,115.82 v66.04,118.36 v66.04,120.9 v66.04,123.44 | v81.28,125.98 v81.28,123.44 v81.28,120.9 v81.28,118.36 v81.28,115.82 v81.28,113.28 v81.28,110.74 v81.28,108.2 v81.28,105.66 v81.28,103.12
  other vias: 90.17,73.91 82.55,73.91 74.93,73.91 67.31,73.91 99.06,73.91
  pour Top (isolate 0.305): 109.22,68.83 55.88,68.83 55.88,77.72 109.22,77.72
  pour Bottom (isolate 0.305): 109.22,68.83 55.88,68.83 55.88,77.72 109.22,77.72
HV_SCL  (via drill 0.38)
  Top 0.254: Q2.3 49.91,22.44 | 49.91,22.44 50.88,22.44 v50.93,22.48 | R5.2 49.87,22.48 49.91,22.44
  Bottom 0.254: J4.1 U1.A5 53.85,63.25 54.61,62.48 54.61,23.88 53.21,22.48 v50.93,22.48
HV_SCL1  (via drill 0.38)
  Top 0.254: Q4.3 103.76,22.44 | 103.76,22.44 104.73,22.44 v104.77,22.48 | R8.2 103.72,22.48 103.76,22.44
  Bottom 0.254: J12.1 U2.A5 107.7,63.25 108.46,62.48 108.46,23.88 107.06,22.48 v104.77,22.48
HV_SCL2  (via drill 0.38)
  Top 0.254: Q6.3 49.91,82.63 | 49.91,82.63 50.88,82.63 v50.93,82.68 | R12.2 49.87,82.67 49.91,82.63
  Bottom 0.254: J20.1 U3.A5 53.85,123.44 54.61,122.68 54.61,84.07 53.21,82.68 v50.93,82.68
HV_SCL3  (via drill 0.38)
  Top 0.254: Q8.3 103.76,82.63 | 103.76,82.63 104.73,82.63 v104.77,82.68 | R16.2 103.72,82.67 103.76,82.63
  Bottom 0.254: J28.1 U4.A5 107.7,123.44 108.46,122.68 108.46,84.07 107.06,82.68 v104.77,82.68
HV_SDA
  Top 0.254: Q1.3 53.42,22.44 53.68,22.69 R4.2 53.68,25.06 52.83,25.91 51.44,25.91 50.93,26.42 50.93,60.2 51.44,60.71 U1.A4
  Bottom 0.254: J4.2 U1.A4
HV_SDA1
  Top 0.254: Q3.3 107.27,22.44 107.53,22.69 R6.2 107.53,25.06 106.68,25.91 105.28,25.91 104.77,26.42 104.77,60.2 105.28,60.71 U2.A4
  Bottom 0.254: J12.2 U2.A4
HV_SDA2
  Top 0.254: Q5.3 53.42,82.63 53.68,82.89 R10.2 53.68,85.26 52.83,86.11 51.44,86.11 50.93,86.61 50.93,120.4 51.44,120.9 U3.A4
  Bottom 0.254: J20.2 U3.A4
HV_SDA3
  Top 0.254: Q7.3 107.27,82.63 107.53,82.89 R14.2 107.53,85.26 106.68,86.11 105.28,86.11 104.77,86.61 104.77,120.4 105.28,120.9 U4.A4
  Bottom 0.254: J28.2 U4.A4
IOREF
  Bottom 0.254: J6.1 U1.IOREF
IOREF1
  Bottom 0.254: J13.1 U2.IOREF
IOREF2
  Bottom 0.254: J21.1 U3.IOREF
IOREF3
  Bottom 0.254: J29.1 U4.IOREF
N$1  (via drill 1.02 pad 1.88)
  other vias: 17.27,65.79
N$2  (via drill 1.02 pad 1.88)
  other vias: 17.27,63.25
N$3  (via drill 1.02 pad 1.88)
  other vias: 17.27,60.71
N$4  (via drill 1.02 pad 1.88)
  other vias: 14.73,65.79
N$5  (via drill 1.02 pad 1.88)
  other vias: 14.73,63.25
N$6  (via drill 1.02 pad 1.88)
  other vias: 14.73,60.71
N$7  (via drill 1.02 pad 1.88)
  other vias: 14.73,58.17
N$8  (via drill 1.02 pad 1.88)
  other vias: 17.27,58.17
N$9  (via drill 1.02 pad 1.88)
  other vias: 17.27,55.63
N$10  (via drill 1.02 pad 1.88)
  other vias: 14.73,55.63
N$11  (via drill 1.02 pad 1.88)
  other vias: 14.73,53.09
N$12  (via drill 1.02 pad 1.88)
  other vias: 17.27,53.09
N$13  (via drill 1.02 pad 1.88)
  other vias: 17.27,50.55
N$14  (via drill 1.02 pad 1.88)
  other vias: 14.73,50.55
N$15  (via drill 1.02 pad 1.88)
  other vias: 14.73,48.01
N$16  (via drill 1.02 pad 1.88)
  other vias: 17.27,48.01
N$17  (via drill 1.02 pad 1.88)
  other vias: 17.27,45.47
N$18  (via drill 1.02 pad 1.88)
  other vias: 14.73,45.47
N$19  (via drill 1.02 pad 1.88)
  other vias: 14.73,42.93
N$20  (via drill 1.02 pad 1.88)
  other vias: 19.81,45.47
N$21  (via drill 1.02 pad 1.88)
  other vias: 22.35,45.47
N$22  (via drill 1.02 pad 1.88)
  other vias: 24.89,45.47
N$23  (via drill 1.02 pad 1.88)
  other vias: 24.89,42.93
N$24  (via drill 1.02 pad 1.88)
  other vias: 22.35,42.93
N$25  (via drill 1.02 pad 1.88)
  other vias: 32.51,42.93
N$26  (via drill 1.02 pad 1.88)
  other vias: 35.05,42.93
N$27  (via drill 1.02 pad 1.88)
  other vias: 35.05,45.47
N$28  (via drill 1.02 pad 1.88)
  other vias: 32.51,45.47
N$29  (via drill 1.02 pad 1.88)
  other vias: 37.59,45.47
N$30  (via drill 1.02 pad 1.88)
  other vias: 40.13,45.47
N$31  (via drill 1.02 pad 1.88)
  other vias: 42.67,45.47
N$32  (via drill 1.02 pad 1.88)
  other vias: 42.67,48.01
N$33  (via drill 1.02 pad 1.88)
  other vias: 40.13,48.01
N$34  (via drill 1.02 pad 1.88)
  other vias: 40.13,50.55
N$35  (via drill 1.02 pad 1.88)
  other vias: 42.67,50.55
N$36  (via drill 1.02 pad 1.88)
  other vias: 42.67,53.09
N$37  (via drill 1.02 pad 1.88)
  other vias: 40.13,53.09
N$38  (via drill 1.02 pad 1.88)
  other vias: 40.13,55.63
N$39  (via drill 1.02 pad 1.88)
  other vias: 42.67,55.63
N$40  (via drill 1.02 pad 1.88)
  other vias: 42.67,58.17
N$41  (via drill 1.02 pad 1.88)
  other vias: 40.13,58.17
N$42  (via drill 1.02 pad 1.88)
  other vias: 40.13,60.71
N$43  (via drill 1.02 pad 1.88)
  other vias: 42.67,60.71
N$44  (via drill 1.02 pad 1.88)
  other vias: 42.67,63.25
N$45  (via drill 1.02 pad 1.88)
  other vias: 40.13,63.25
N$46  (via drill 1.02 pad 1.88)
  other vias: 40.13,65.79
N$47  (via drill 1.02 pad 1.88)
  other vias: 42.67,65.79
N$48  (via drill 1.02 pad 1.88)
  other vias: 14.73,40.39
N$49  (via drill 1.02 pad 1.88)
  other vias: 14.73,37.85
N$50  (via drill 1.02 pad 1.88)
  other vias: 17.27,37.85
N$51  (via drill 1.02 pad 1.88)
  other vias: 19.81,37.85
N$52  (via drill 1.02 pad 1.88)
  other vias: 22.35,37.85
N$53  (via drill 1.02 pad 1.88)
  other vias: 22.35,40.39
N$54  (via drill 1.02 pad 1.88)
  other vias: 24.89,40.39
N$55  (via drill 1.02 pad 1.88)
  other vias: 24.89,37.85
N$56  (via drill 1.02 pad 1.88)
  other vias: 24.89,35.31
N$57  (via drill 1.02 pad 1.88)
  other vias: 27.43,35.31
N$58  (via drill 1.02 pad 1.88)
  other vias: 29.97,35.31
N$59  (via drill 1.02 pad 1.88)
  other vias: 32.51,35.31
N$60  (via drill 1.02 pad 1.88)
  other vias: 32.51,37.85
N$61  (via drill 1.02 pad 1.88)
  other vias: 32.51,40.39
N$62  (via drill 1.02 pad 1.88)
  other vias: 35.05,40.39
N$63  (via drill 1.02 pad 1.88)
  other vias: 35.05,37.85
N$64  (via drill 1.02 pad 1.88)
  other vias: 35.05,35.31
N$65  (via drill 1.02 pad 1.88)
  other vias: 37.59,35.31
N$66  (via drill 1.02 pad 1.88)
  other vias: 37.59,37.85
N$67  (via drill 1.02 pad 1.88)
  other vias: 40.13,37.85
N$68  (via drill 1.02 pad 1.88)
  other vias: 42.67,37.85
N$69  (via drill 1.02 pad 1.88)
  other vias: 45.21,37.85
N$70  (via drill 1.02 pad 1.88)
  other vias: 45.21,40.39
N$71  (via drill 1.02 pad 1.88)
  other vias: 45.21,42.93
N$72  (via drill 1.02 pad 1.88)
  other vias: 45.21,45.47
N$73  (via drill 1.02 pad 1.88)
  other vias: 45.21,48.01
N$74  (via drill 1.02 pad 1.88)
  other vias: 42.67,42.93
N$75  (via drill 1.02 pad 1.88)
  other vias: 42.67,40.39
N$76  (via drill 1.02 pad 1.88)
  other vias: 45.21,35.31
N$77  (via drill 1.02 pad 1.88)
  other vias: 42.67,35.31
N$78  (via drill 1.02 pad 1.88)
  other vias: 45.21,32.77
N$79  (via drill 1.02 pad 1.88)
  other vias: 42.67,32.77
N$80  (via drill 1.02 pad 1.88)
  other vias: 40.13,32.77
N$81  (via drill 1.02 pad 1.88)
  other vias: 40.13,35.31
N$82  (via drill 1.02 pad 1.88)
  other vias: 37.59,32.77
N$83  (via drill 1.02 pad 1.88)
  other vias: 35.05,32.77
N$84  (via drill 1.02 pad 1.88)
  other vias: 32.51,32.77
N$85  (via drill 1.02 pad 1.88)
  other vias: 29.97,32.77
N$86  (via drill 1.02 pad 1.88)
  other vias: 27.43,32.77
N$87  (via drill 1.02 pad 1.88)
  other vias: 24.89,32.77
N$88  (via drill 1.02 pad 1.88)
  other vias: 22.35,32.77
N$89  (via drill 1.02 pad 1.88)
  other vias: 22.35,35.31
N$90  (via drill 1.02 pad 1.88)
  other vias: 19.81,35.31
N$91  (via drill 1.02 pad 1.88)
  other vias: 19.81,32.77
N$92  (via drill 1.02 pad 1.88)
  other vias: 17.27,32.77
N$93  (via drill 1.02 pad 1.88)
  other vias: 17.27,35.31
N$94  (via drill 1.02 pad 1.88)
  other vias: 14.73,35.31
N$95  (via drill 1.02 pad 1.88)
  other vias: 14.73,32.77
N$96  (via drill 1.02 pad 1.88)
  other vias: 14.73,30.23
N$97  (via drill 1.02 pad 1.88)
  other vias: 17.27,30.23
N$98  (via drill 1.02 pad 1.88)
  other vias: 19.81,30.23
N$99  (via drill 1.02 pad 1.88)
  other vias: 22.35,30.23
N$100  (via drill 1.02 pad 1.88)
  other vias: 24.89,30.23
N$101  (via drill 1.02 pad 1.88)
  other vias: 27.43,30.23
N$102  (via drill 1.02 pad 1.88)
  other vias: 29.97,30.23
N$103  (via drill 1.02 pad 1.88)
  other vias: 32.51,30.23
N$104  (via drill 1.02 pad 1.88)
  other vias: 35.05,30.23
N$105  (via drill 1.02 pad 1.88)
  other vias: 37.59,30.23
N$106  (via drill 1.02 pad 1.88)
  other vias: 40.13,30.23
N$107  (via drill 1.02 pad 1.88)
  other vias: 42.67,30.23
N$108  (via drill 1.02 pad 1.88)
  other vias: 45.21,30.23
N$109  (via drill 1.02 pad 1.88)
  other vias: 45.21,27.69
N$110  (via drill 1.02 pad 1.88)
  other vias: 42.67,27.69
N$111  (via drill 1.02 pad 1.88)
  other vias: 40.13,27.69
N$112  (via drill 1.02 pad 1.88)
  other vias: 37.59,27.69
N$113  (via drill 1.02 pad 1.88)
  other vias: 35.05,27.69
N$114  (via drill 1.02 pad 1.88)
  other vias: 32.51,27.69
N$115  (via drill 1.02 pad 1.88)
  other vias: 29.97,27.69
N$116  (via drill 1.02 pad 1.88)
  other vias: 27.43,27.69
N$117  (via drill 1.02 pad 1.88)
  other vias: 24.89,27.69
N$118  (via drill 1.02 pad 1.88)
  other vias: 22.35,27.69
N$119  (via drill 1.02 pad 1.88)
  other vias: 19.81,27.69
N$120  (via drill 1.02 pad 1.88)
  other vias: 17.27,27.69
N$121  (via drill 1.02 pad 1.88)
  other vias: 14.73,27.69
N$122  (via drill 1.02 pad 1.88)
  other vias: 14.73,25.15
N$123  (via drill 1.02 pad 1.88)
  other vias: 17.27,25.15
N$124  (via drill 1.02 pad 1.88)
  other vias: 19.81,25.15
N$125  (via drill 1.02 pad 1.88)
  other vias: 22.35,25.15
N$126  (via drill 1.02 pad 1.88)
  other vias: 24.89,25.15
N$127  (via drill 1.02 pad 1.88)
  other vias: 27.43,25.15
N$128  (via drill 1.02 pad 1.88)
  other vias: 29.97,25.15
N$129  (via drill 1.02 pad 1.88)
  other vias: 32.51,25.15
N$130  (via drill 1.02 pad 1.88)
  other vias: 35.05,25.15
N$131  (via drill 1.02 pad 1.88)
  other vias: 37.59,25.15
N$132  (via drill 1.02 pad 1.88)
  other vias: 40.13,25.15
N$133  (via drill 1.02 pad 1.88)
  other vias: 42.67,25.15
N$134  (via drill 1.02 pad 1.88)
  other vias: 45.21,25.15
N$135  (via drill 1.02 pad 1.88)
  other vias: 45.21,22.61
N$136  (via drill 1.02 pad 1.88)
  other vias: 42.67,22.61
N$137  (via drill 1.02 pad 1.88)
  other vias: 35.05,22.61
N$138  (via drill 1.02 pad 1.88)
  other vias: 32.51,22.61
N$139  (via drill 1.02 pad 1.88)
  other vias: 29.97,22.61
N$140  (via drill 1.02 pad 1.88)
  other vias: 27.43,22.61
N$141  (via drill 1.02 pad 1.88)
  other vias: 24.89,22.61
N$142  (via drill 1.02 pad 1.88)
  other vias: 22.35,22.61
N$143  (via drill 1.02 pad 1.88)
  other vias: 14.73,22.61
N$144  (via drill 1.02 pad 1.88)
  other vias: 14.73,20.07
N$145  (via drill 1.02 pad 1.88)
  other vias: 22.35,20.07
N$146  (via drill 1.02 pad 1.88)
  other vias: 24.89,20.07
N$147  (via drill 1.02 pad 1.88)
  other vias: 27.43,20.07
N$148  (via drill 1.02 pad 1.88)
  other vias: 29.97,20.07
N$149  (via drill 1.02 pad 1.88)
  other vias: 32.51,20.07
N$150  (via drill 1.02 pad 1.88)
  other vias: 35.05,20.07
N$151  (via drill 1.02 pad 1.88)
  other vias: 42.67,20.07
N$152  (via drill 1.02 pad 1.88)
  other vias: 45.21,20.07
N$153  (via drill 1.02 pad 1.88)
  other vias: 71.12,65.79
N$154  (via drill 1.02 pad 1.88)
  other vias: 71.12,63.25
N$155  (via drill 1.02 pad 1.88)
  other vias: 71.12,60.71
N$156  (via drill 1.02 pad 1.88)
  other vias: 68.58,65.79
N$157  (via drill 1.02 pad 1.88)
  other vias: 68.58,63.25
N$158  (via drill 1.02 pad 1.88)
  other vias: 68.58,60.71
N$159  (via drill 1.02 pad 1.88)
  other vias: 68.58,58.17
N$160  (via drill 1.02 pad 1.88)
  other vias: 71.12,58.17
N$161  (via drill 1.02 pad 1.88)
  other vias: 71.12,55.63
N$162  (via drill 1.02 pad 1.88)
  other vias: 68.58,55.63
N$163  (via drill 1.02 pad 1.88)
  other vias: 68.58,53.09
N$164  (via drill 1.02 pad 1.88)
  other vias: 71.12,53.09
N$165  (via drill 1.02 pad 1.88)
  other vias: 71.12,50.55
N$166  (via drill 1.02 pad 1.88)
  other vias: 68.58,50.55
N$167  (via drill 1.02 pad 1.88)
  other vias: 68.58,48.01
N$168  (via drill 1.02 pad 1.88)
  other vias: 71.12,48.01
N$169  (via drill 1.02 pad 1.88)
  other vias: 71.12,45.47
N$170  (via drill 1.02 pad 1.88)
  other vias: 68.58,45.47
N$171  (via drill 1.02 pad 1.88)
  other vias: 68.58,42.93
N$172  (via drill 1.02 pad 1.88)
  other vias: 73.66,45.47
N$173  (via drill 1.02 pad 1.88)
  other vias: 76.2,45.47
N$174  (via drill 1.02 pad 1.88)
  other vias: 78.74,45.47
N$175  (via drill 1.02 pad 1.88)
  other vias: 78.74,42.93
N$176  (via drill 1.02 pad 1.88)
  other vias: 76.2,42.93
N$177  (via drill 1.02 pad 1.88)
  other vias: 86.36,42.93
N$178  (via drill 1.02 pad 1.88)
  other vias: 88.9,42.93
N$179  (via drill 1.02 pad 1.88)
  other vias: 88.9,45.47
N$180  (via drill 1.02 pad 1.88)
  other vias: 86.36,45.47
N$181  (via drill 1.02 pad 1.88)
  other vias: 91.44,45.47
N$182  (via drill 1.02 pad 1.88)
  other vias: 93.98,45.47
N$183  (via drill 1.02 pad 1.88)
  other vias: 96.52,45.47
N$184  (via drill 1.02 pad 1.88)
  other vias: 96.52,48.01
N$185  (via drill 1.02 pad 1.88)
  other vias: 93.98,48.01
N$186  (via drill 1.02 pad 1.88)
  other vias: 93.98,50.55
N$187  (via drill 1.02 pad 1.88)
  other vias: 96.52,50.55
N$188  (via drill 1.02 pad 1.88)
  other vias: 96.52,53.09
N$189  (via drill 1.02 pad 1.88)
  other vias: 93.98,53.09
N$190  (via drill 1.02 pad 1.88)
  other vias: 93.98,55.63
N$191  (via drill 1.02 pad 1.88)
  other vias: 96.52,55.63
N$192  (via drill 1.02 pad 1.88)
  other vias: 96.52,58.17
N$193  (via drill 1.02 pad 1.88)
  other vias: 93.98,58.17
N$194  (via drill 1.02 pad 1.88)
  other vias: 93.98,60.71
N$195  (via drill 1.02 pad 1.88)
  other vias: 96.52,60.71
N$196  (via drill 1.02 pad 1.88)
  other vias: 96.52,63.25
N$197  (via drill 1.02 pad 1.88)
  other vias: 93.98,63.25
N$198  (via drill 1.02 pad 1.88)
  other vias: 93.98,65.79
N$199  (via drill 1.02 pad 1.88)
  other vias: 96.52,65.79
N$200  (via drill 1.02 pad 1.88)
  other vias: 68.58,40.39
N$201  (via drill 1.02 pad 1.88)
  other vias: 68.58,37.85
N$202  (via drill 1.02 pad 1.88)
  other vias: 71.12,37.85
N$203  (via drill 1.02 pad 1.88)
  other vias: 73.66,37.85
N$204  (via drill 1.02 pad 1.88)
  other vias: 76.2,37.85
N$205  (via drill 1.02 pad 1.88)
  other vias: 76.2,40.39
N$206  (via drill 1.02 pad 1.88)
  other vias: 78.74,40.39
N$207  (via drill 1.02 pad 1.88)
  other vias: 78.74,37.85
N$208  (via drill 1.02 pad 1.88)
  other vias: 78.74,35.31
N$209  (via drill 1.02 pad 1.88)
  other vias: 81.28,35.31
N$210  (via drill 1.02 pad 1.88)
  other vias: 83.82,35.31
N$211  (via drill 1.02 pad 1.88)
  other vias: 86.36,35.31
N$212  (via drill 1.02 pad 1.88)
  other vias: 86.36,37.85
N$213  (via drill 1.02 pad 1.88)
  other vias: 86.36,40.39
N$214  (via drill 1.02 pad 1.88)
  other vias: 88.9,40.39
N$215  (via drill 1.02 pad 1.88)
  other vias: 88.9,37.85
N$216  (via drill 1.02 pad 1.88)
  other vias: 88.9,35.31
N$217  (via drill 1.02 pad 1.88)
  other vias: 91.44,35.31
N$218  (via drill 1.02 pad 1.88)
  other vias: 91.44,37.85
N$219  (via drill 1.02 pad 1.88)
  other vias: 93.98,37.85
N$220  (via drill 1.02 pad 1.88)
  other vias: 96.52,37.85
N$221  (via drill 1.02 pad 1.88)
  other vias: 99.06,37.85
N$222  (via drill 1.02 pad 1.88)
  other vias: 99.06,40.39
N$223  (via drill 1.02 pad 1.88)
  other vias: 99.06,42.93
N$224  (via drill 1.02 pad 1.88)
  other vias: 99.06,45.47
N$225  (via drill 1.02 pad 1.88)
  other vias: 99.06,48.01
N$226  (via drill 1.02 pad 1.88)
  other vias: 96.52,42.93
N$227  (via drill 1.02 pad 1.88)
  other vias: 96.52,40.39
N$228  (via drill 1.02 pad 1.88)
  other vias: 99.06,35.31
N$229  (via drill 1.02 pad 1.88)
  other vias: 96.52,35.31
N$230  (via drill 1.02 pad 1.88)
  other vias: 99.06,32.77
N$231  (via drill 1.02 pad 1.88)
  other vias: 96.52,32.77
N$232  (via drill 1.02 pad 1.88)
  other vias: 93.98,32.77
N$233  (via drill 1.02 pad 1.88)
  other vias: 93.98,35.31
N$234  (via drill 1.02 pad 1.88)
  other vias: 91.44,32.77
N$235  (via drill 1.02 pad 1.88)
  other vias: 88.9,32.77
N$236  (via drill 1.02 pad 1.88)
  other vias: 86.36,32.77
N$237  (via drill 1.02 pad 1.88)
  other vias: 83.82,32.77
N$238  (via drill 1.02 pad 1.88)
  other vias: 81.28,32.77
N$239  (via drill 1.02 pad 1.88)
  other vias: 78.74,32.77
N$240  (via drill 1.02 pad 1.88)
  other vias: 76.2,32.77
N$241  (via drill 1.02 pad 1.88)
  other vias: 76.2,35.31
N$242  (via drill 1.02 pad 1.88)
  other vias: 73.66,35.31
N$243  (via drill 1.02 pad 1.88)
  other vias: 73.66,32.77
N$244  (via drill 1.02 pad 1.88)
  other vias: 71.12,32.77
N$245  (via drill 1.02 pad 1.88)
  other vias: 71.12,35.31
N$246  (via drill 1.02 pad 1.88)
  other vias: 68.58,35.31
N$247  (via drill 1.02 pad 1.88)
  other vias: 68.58,32.77
N$248  (via drill 1.02 pad 1.88)
  other vias: 68.58,30.23
N$249  (via drill 1.02 pad 1.88)
  other vias: 71.12,30.23
N$250  (via drill 1.02 pad 1.88)
  other vias: 73.66,30.23
N$251  (via drill 1.02 pad 1.88)
  other vias: 76.2,30.23
N$252  (via drill 1.02 pad 1.88)
  other vias: 78.74,30.23
N$253  (via drill 1.02 pad 1.88)
  other vias: 81.28,30.23
N$254  (via drill 1.02 pad 1.88)
  other vias: 83.82,30.23
N$255  (via drill 1.02 pad 1.88)
  other vias: 86.36,30.23
N$256  (via drill 1.02 pad 1.88)
  other vias: 88.9,30.23
N$257  (via drill 1.02 pad 1.88)
  other vias: 91.44,30.23
N$258  (via drill 1.02 pad 1.88)
  other vias: 93.98,30.23
N$259  (via drill 1.02 pad 1.88)
  other vias: 96.52,30.23
N$260  (via drill 1.02 pad 1.88)
  other vias: 99.06,30.23
N$261  (via drill 1.02 pad 1.88)
  other vias: 99.06,27.69
N$262  (via drill 1.02 pad 1.88)
  other vias: 96.52,27.69
N$263  (via drill 1.02 pad 1.88)
  other vias: 93.98,27.69
N$264  (via drill 1.02 pad 1.88)
  other vias: 91.44,27.69
N$265  (via drill 1.02 pad 1.88)
  other vias: 88.9,27.69
N$266  (via drill 1.02 pad 1.88)
  other vias: 86.36,27.69
N$267  (via drill 1.02 pad 1.88)
  other vias: 83.82,27.69
N$268  (via drill 1.02 pad 1.88)
  other vias: 81.28,27.69
N$269  (via drill 1.02 pad 1.88)
  other vias: 78.74,27.69
N$270  (via drill 1.02 pad 1.88)
  other vias: 76.2,27.69
N$271  (via drill 1.02 pad 1.88)
  other vias: 73.66,27.69
N$272  (via drill 1.02 pad 1.88)
  other vias: 71.12,27.69
N$273  (via drill 1.02 pad 1.88)
  other vias: 68.58,27.69
N$274  (via drill 1.02 pad 1.88)
  other vias: 68.58,25.15
N$275  (via drill 1.02 pad 1.88)
  other vias: 71.12,25.15
N$276  (via drill 1.02 pad 1.88)
  other vias: 73.66,25.15
N$277  (via drill 1.02 pad 1.88)
  other vias: 76.2,25.15
N$278  (via drill 1.02 pad 1.88)
  other vias: 78.74,25.15
N$279  (via drill 1.02 pad 1.88)
  other vias: 81.28,25.15
N$280  (via drill 1.02 pad 1.88)
  other vias: 83.82,25.15
N$281  (via drill 1.02 pad 1.88)
  other vias: 86.36,25.15
N$282  (via drill 1.02 pad 1.88)
  other vias: 88.9,25.15
N$283  (via drill 1.02 pad 1.88)
  other vias: 91.44,25.15
N$284  (via drill 1.02 pad 1.88)
  other vias: 93.98,25.15
N$285  (via drill 1.02 pad 1.88)
  other vias: 96.52,25.15
N$286  (via drill 1.02 pad 1.88)
  other vias: 99.06,25.15
N$287  (via drill 1.02 pad 1.88)
  other vias: 99.06,22.61
N$288  (via drill 1.02 pad 1.88)
  other vias: 96.52,22.61
N$289  (via drill 1.02 pad 1.88)